# Altium PCB board1.PcbDoc
Units mil, origin at the board's own origin, x right, y up, seen from the top; angles counter-clockwise.
Board outline 6000 x 4000 mil, 2 copper layers (Top Layer, Bottom Layer); 3 components, 6 nets, 12 pads, 0 vias.
Unrouted connection lines stored in the file: 6.
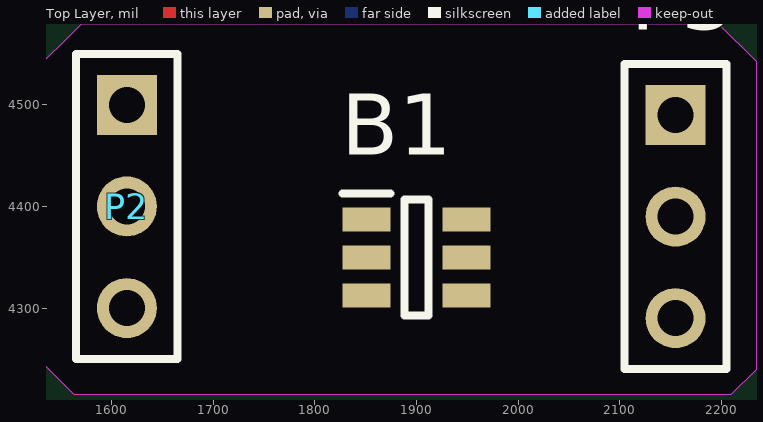
[diagram p0: Top Layer view]
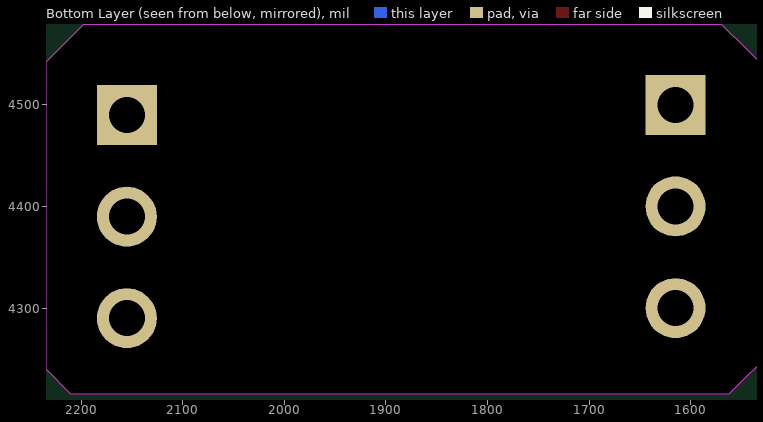
[diagram p1: Bottom Layer view, seen from below]

## Layer stack, top to bottom
Top Solder: solder mask 0.4, Solder Resist, Dk 3.5
Top Layer: signal copper 1.4
Dielectric 1: dielectric 12.6, FR-4, Dk 4.8
Bottom Layer: signal copper 1.4
Bottom Solder: solder mask 0.4, Solder Resist, Dk 3.5

## Board outline
1000,1000 7000,1000 7000,5000 1000,5000
cut-out: 1570,4580 1517.5,4527.5 1517.5,4260 1562.5,4215 2210,4215 2235,4240 2235,4542.5 2197.5,4580

## Design rules (kind name [scope] priority, off if disabled: settings)
Clearance [All] p1: gap=10 ignorepadtopadclearanceinfootprint=FALSE except(0: Arc-Hole Track-Hole SMDPad-Hole THPad-Hole Via-Hole Fill-Hole Poly-Hole Region-Hole Text-Hole)
PolygonConnect [All] p1: connectstyle=Relief reliefconductorwidth=10 reliefentries=4 polygonreliefangle="90 Angle" airgapwidth=10
RoomDefinition board1 [InComponentClass('board1')] p1: confinementstyle=ConfineIn formatcopy=TRUE lockcomponents=FALSE outline 7045,1060 7940,1060 7940,1460 7045,1460
RoutingVias [All] p1: holewidth=28 width=50 viastyle="Through Hole" minholewidth=28 minwidth=50 maxholewidth=28 maxwidth=50
SolderMaskExpansion [All] p1: expansion=4 istentingtop=FALSE
Width [All] p1: maxlimit=10 minlimit=10 preferedwidth=10
30 further rules are at their usual default settings.

## Classes and differential pairs
component class board1: B1 P3

## Components (designator, comment, footprint, x,y, rotation, side; value= is the part's Value field where it differs from the comment)
B1 "TMP100NA_3KG4" SOT95P280X145-6N 1900,4350 r0 top
P2 "Header 3" HDR1X3 1615,4500 r270 top
P3 "Header 3" HDR1X3 2155,4490 r270 top

## Footprints (in the part's own frame and the unit in brackets; to place one, negate y for a bottom-side part, rotate by r counter-clockwise, add the part's x,y. Pads: shape width x height; smd on the part's side, far side on the other; paste and mask are expansions set on the pad)
HDR1X3 [mm] "Connector; Header; 3 Position"
  rect 1.5x1.5 hole 0.9: 1(0,0)
  round 1.5 hole 0.9: 2(2.54,0) 3(5.08,0)
  silkscreen extent -1.27,-1.27 6.35,1.27
SOT95P280X145-6N [mm]
  rect 1.2x0.6 smd: 1(-1.25,0.95) 2(-1.25,0) 3(-1.25,-0.95) 4(1.25,-0.95) 5(1.25,0) 6(1.25,0.95)
  silkscreen extent -1.85,-1.45 0.3,1.6

## Part data
B1: "Board Mount Temperature Sensors Digital Temp Sensor w/I2C Ser Interface", Manufacturer_Name="Texas Instruments", Manufacturer_Part_Number=TMP100NA/3KG4, Mouser Part Number=595-TMP100NA/3KG4, Datasheet Link=https://www.ti.com/lit/ds/symlink/tmp100.pdf?HQS=dis-mous-null-mousermode-dsf-pf-null-wwe&ts=1645782280887&ref_url=https%253A%252F%252Fwww.mouser.in%252F, Geometry.Height=1.45mm, Mouser Price/Stock=https://www.mouser.co.uk/ProductDetail/Texas-Instruments/TMP100NA-3KG4?qs=RnzODY3cU8vFEcRbQgecuQ%3D%3D
P2 P3: "Header, 3-Pin", LatestRevisionDate=17-Jul-2002, LatestRevisionNote="Re-released for DXP Platform.", Publisher="Altium Limited"

## Nets (pads, with @x,y where several pads share a name; then routed paths per layer and width w, separated by ;. In a path a pad name is that pad's centre, name@x,y a point inside that pad or via, vN(x,y) a via of type N, cw(c..) or ccw(c..) an arc to the next point about the centre after c; other vN are vias at no path point)
ADD0: B1.5 P3.2
ADD1: B1.3 P2.3
GND: B1.2 P2.2
SCL: B1.1 P2.1
SDA: B1.6 P3.1
VCC: B1.4 P3.3